# Altium PCB shinei8trfuzz.PcbDoc
Units mm, origin at the board's own origin, x right, y up, seen from the top; angles counter-clockwise.
Board outline 67.26 x 39.07 mm, 2 copper layers (Top Layer, Bottom Layer); 58 components, 31 nets, 125 pads, 6 vias.
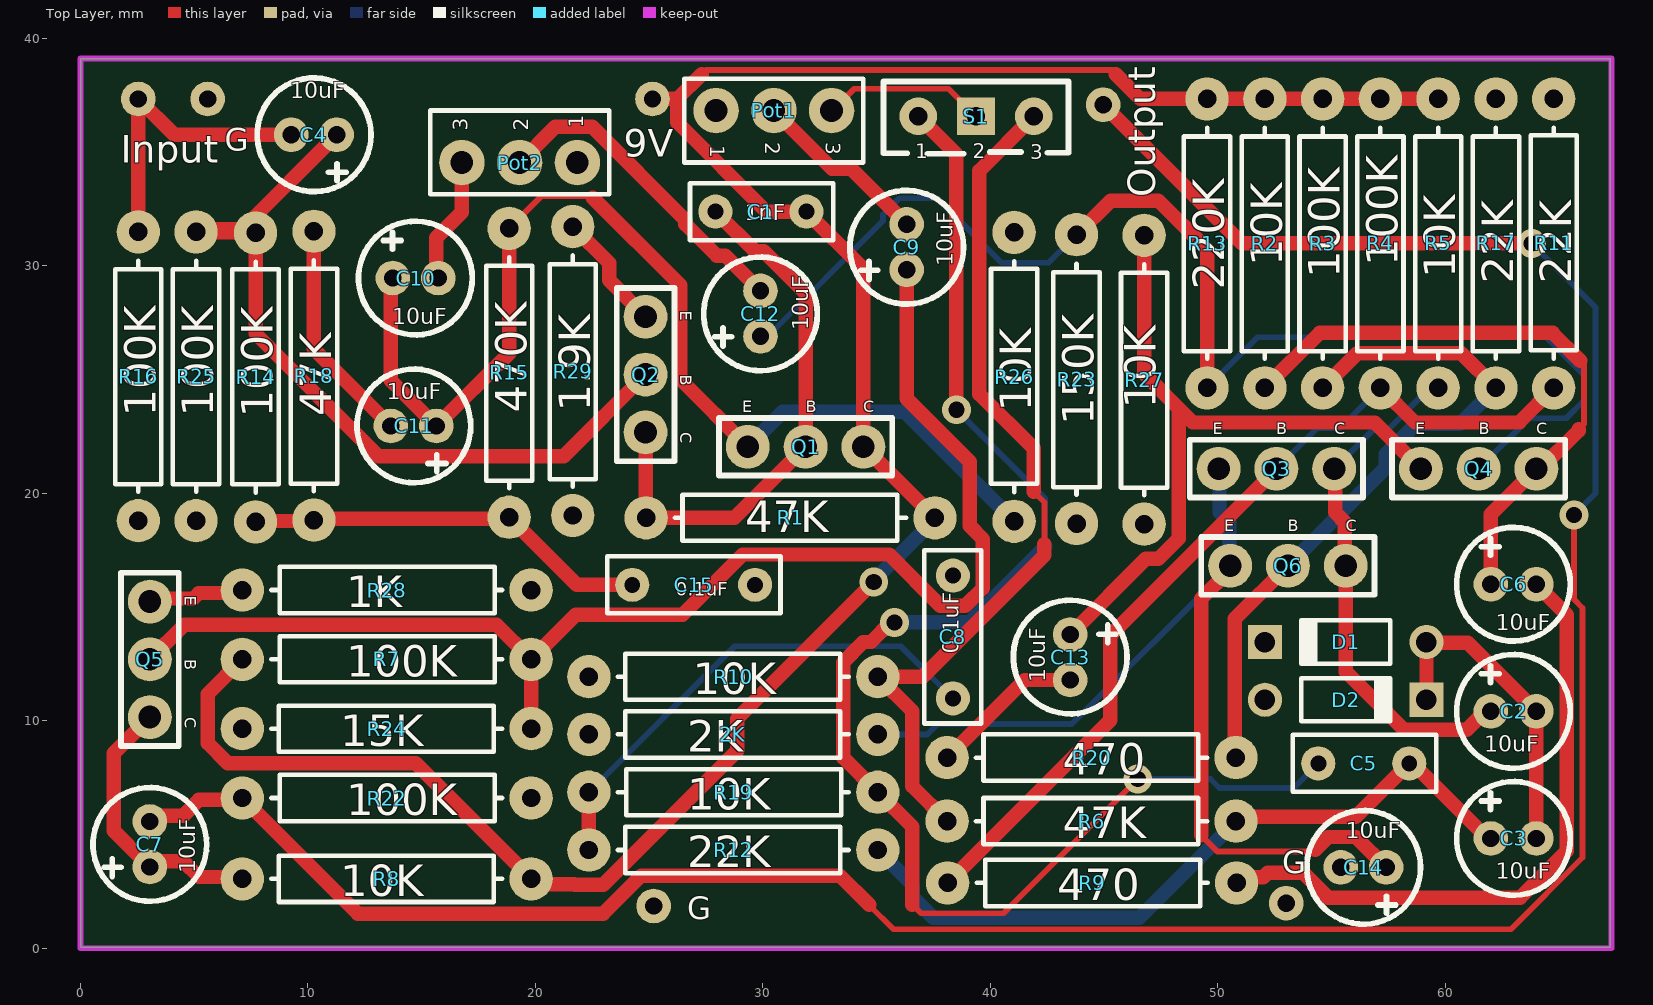
[diagram p0: Top Layer view]
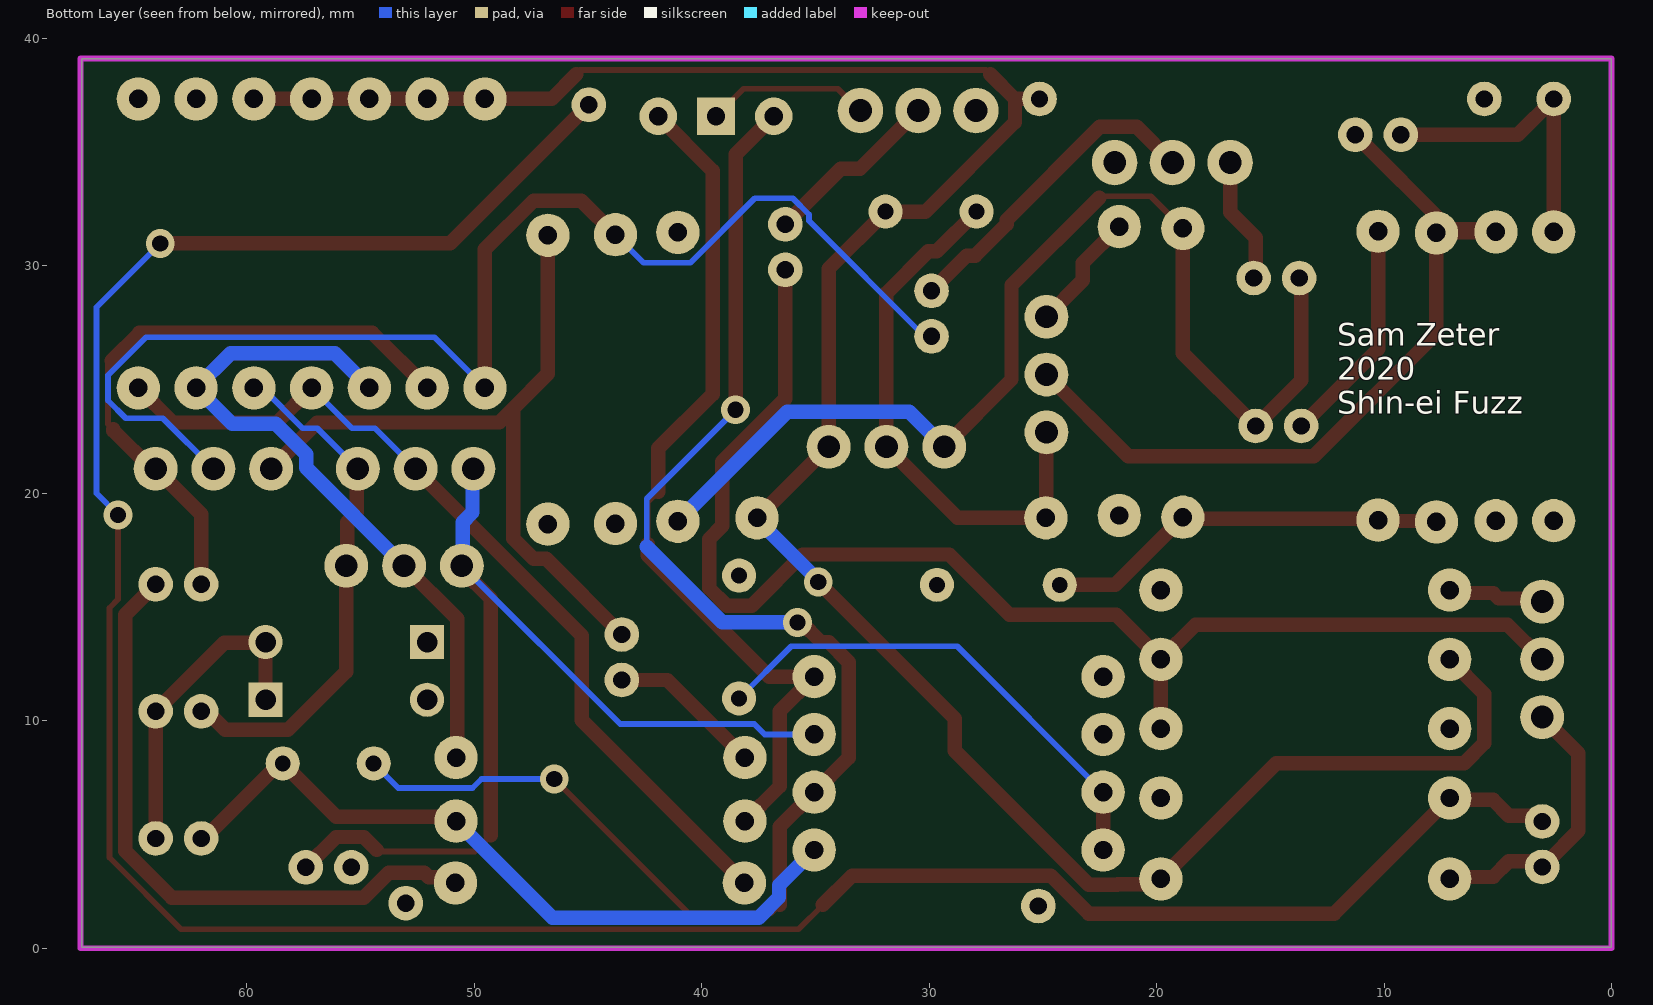
[diagram p1: Bottom Layer view, seen from below]

## Layer stack, top to bottom
Top Solder: solder mask 0.0102, Solder Resist, Dk 3.5
Top Layer: signal copper 0.0356
Dielectric 1: dielectric 0.32, FR-4, Dk 4.8
Bottom Layer: signal copper 0.0356
Bottom Solder: solder mask 0.0102, Solder Resist, Dk 3.5

## Board outline
0,0.051 67.259,0.051 67.259,39.065 67.208,39.116 0,39.116

## Design rules (kind name [scope] priority, off if disabled: settings)
BoardOutlineClearance [All] p1: gap=0.381 ignorepadtopadclearanceinfootprint=FALSE
Clearance [All] p1: gap=0.152 ignorepadtopadclearanceinfootprint=FALSE except(0: Arc-Hole Track-Hole SMDPad-Hole THPad-Hole Via-Hole Fill-Hole Poly-Hole Region-Hole Text-Hole)
ComponentClearance [All] p1: gap=0.025 collisioncheckmode=3 verticalgap=0.025 showdistances=FALSE
DiffPairsRouting [All] p1: maxlimit=10 minlimit=0.152 mostfreqgap=0.203 toplayer_minwidth=0.152 toplayer_maxwidth=0.381 toplayer_prefwidth=0.203 bottomlayer_minwidth=0.152 bottomlayer_maxwidth=0.381 bottomlayer_prefwidth=0.203 maxuncoupledlength=12.7
HoleSize [All] p1: absolutevalues=TRUE maxlimit=6.731 minlimit=0.33 maxpercent=80.000 minpercent=20.000
HoleToHoleClearance [All] p1: gap=0.254 allowstackedmicrovias=FALSE
MinimumAnnularRing [All] p1: minimumring=0.178
MinimumSolderMaskSliver [All] p1: minsoldermaskwidth=0
PlaneClearance [All] p1: clearance=0.254
PlaneConnect [All] p1: planeconnectstyle=Direct reliefexpansion=0.406 reliefentries=4 reliefconductorwidth=0.152 reliefairgap=0.152
PolygonConnect [All] p1: connectstyle=Relief reliefconductorwidth=0.203 reliefentries=4 polygonreliefangle="90 Angle" airgapwidth=0.152
RoutingCorners [All] p1: cornerstyle=45-Degree minsetback=1.25 maxsetback=1.25
RoutingVias [All] p1: holewidth=0.381 width=0.762 viastyle="Through Hole" minholewidth=0.33 minwidth=0.686 maxholewidth=2.54 maxwidth=2.896
SilkToSilkClearance [All] p1: silktosilkclearance=0
SilkToSolderMaskClearance [IsPad] p1: minsilkscreentomaskgap=0.152 clearancetoexposedcopper=TRUE
SolderMaskExpansion [All] p1: expansion=0.075
Width [All] p1: maxlimit=10.16 minlimit=0.152 preferedwidth=0.203
20 further rules are at their usual default settings.

## Components (designator, comment, footprint, x,y, rotation, side; value= is the part's Value field where it differs from the comment)
2K "2K" "RES Axial 0.5 Tayda" 22.352,9.398 r0 top value=1K
9V "General purpose pad" Pin 25.146,37.338 r270 top
C1 "1nF" "Cap Green 3.5mm" 27.915,32.385 r0 top
C2 "10uF" "Capacitor Electrolytic 2mm" 63.008,10.414 r0 top
C3 "10uF" "Capacitor Electrolytic 2mm" 63.008,4.826 r0 top
C4 "10uF" "Capacitor Electrolytic 2mm" 10.262,35.763 r180 top
C5 "1nF" "Cap Green 3.5mm" 54.42,8.128 r0 top
C6 "10uF" "Capacitor Electrolytic 2mm" 63.008,16.002 r0 top
C7 "10uF" "Capacitor Electrolytic 2mm" 3.048,4.572 r90 top
C8 "0.1uF" "Cap Green 5.4mm" 38.354,16.383 r270 top
C9 "10uF" "Capacitor Electrolytic 2mm" 36.322,30.826 r90 top
C10 "10uF" "Capacitor Electrolytic 2mm" 14.732,29.464 r0 top
C11 "10uF" "Capacitor Electrolytic 2mm" 14.646,22.962 r180 top
C12 "10uF" "Capacitor Electrolytic 2mm" 29.896,27.899 r90 top
C13 "10uF" "Capacitor Electrolytic 2mm" 43.51,12.792 r270 top
C14 "10uF" "Capacitor Electrolytic 2mm" 56.404,3.556 r180 top
C15 "0.1uF" "Cap Green 5.4mm" 29.657,15.977 r180 top
D1 "Diode 1N914" DO-35 55.626,13.462 r180 top
D2 "Diode 1N914" DO-35 55.626,10.922 r0 top
Input "General purpose pad" Pin 2.54,37.338 r90 top
Output "General purpose pad" Pin 44.958,37.084 r90 top
Pot1 "50KB" Potentiometer 30.48,36.83 r270 top
Pot2 "50KB" Potentiometer 19.304,34.544 r90 top
Q1 "Q2" "NPN Transistor Wide" 29.337,22.047 r0 top
Q2 "Q1" "NPN Transistor Wide" 24.841,27.762 r270 top
Q3 "2N3904" "NPN Transistor Wide" 50.038,21.082 r0 top
Q4 "Q4" "NPN Transistor Wide" 58.928,21.082 r0 top
Q5 "2N3904" "NPN Transistor Wide" 3.048,15.24 r270 top
Q6 "2N3904" "NPN Transistor Wide" 50.546,16.815 r0 top
R1 "47K" "RES Axial 0.5 Tayda" 24.867,18.923 r0 top value=1K
R2 "10K" "RES Axial 0.5 Tayda" 52.07,24.638 r90 top value=1K
R3 "100K" "RES Axial 0.5 Tayda" 54.61,24.638 r90 top value=1K
R4 "100K" "RES Axial 0.5 Tayda" 57.15,24.638 r90 top value=1K
R5 "10K" "RES Axial 0.5 Tayda" 59.69,24.638 r90 top value=1K
R6 "47K" "RES Axial 0.5 Tayda" 38.1,5.588 r0 top value=1K
R7 "100K" "RES Axial 0.5 Tayda" 19.812,12.7 r180 top value=1K
R8 "10K" "RES Axial 0.5 Tayda" 7.112,3.048 r0 top value=1K
R9 "470" "RES Axial 0.5 Tayda" 50.825,2.87 r180 top value=1K
R10 "10K" "RES Axial 0.5 Tayda" 22.352,11.938 r0 top value=1K
R11 "22K" "RES Axial 0.5 Tayda" 64.77,37.338 r270 top value=1K
R12 "22K" "RES Axial 0.5 Tayda" 22.352,4.318 r0 top value=1K
R13 "220K" "RES Axial 0.5 Tayda" 49.53,24.638 r90 top value=1K
R14 "100K" "RES Axial 0.5 Tayda" 7.696,31.445 r270 top value=1K
R15 "470K" "RES Axial 0.5 Tayda" 18.847,18.948 r90 top value=1K
R16 "100K" "RES Axial 0.5 Tayda" 2.54,18.796 r90 top value=1K
R17 "22K" "RES Axial 0.5 Tayda" 62.23,24.638 r90 top value=1K
R18 "47K" "RES Axial 0.5 Tayda" 10.262,18.821 r90 top value=1K
R19 "10K" "RES Axial 0.5 Tayda" 35.052,6.858 r180 top value=1K
R20 "470" "RES Axial 0.5 Tayda" 38.1,8.382 r0 top value=1K
R22 "100K" "RES Axial 0.5 Tayda" 19.812,6.604 r180 top value=1K
R23 "150K" "RES Axial 0.5 Tayda" 43.79,18.669 r90 top value=1K
R24 "15K" "RES Axial 0.5 Tayda" 7.112,9.652 r0 top value=1K
R25 "100K" "RES Axial 0.5 Tayda" 5.08,18.796 r90 top value=1K
R26 "10K" "RES Axial 0.5 Tayda" 41.046,31.471 r270 top value=1K
R27 "10K" "RES Axial 0.5 Tayda" 46.761,18.644 r90 top value=1K
R28 "1K" "RES Axial 0.5 Tayda" 19.812,15.748 r180 top
R29 "1.9K" "RES Axial 0.5 Tayda" 21.641,19.025 r90 top value=1K
S1 "SPDT Switch" "SPDT Switch" 39.37,36.576 r0 top

## Footprints (in the part's own frame and the unit in brackets; to place one, negate y for a bottom-side part, rotate by r counter-clockwise, add the part's x,y. Pads: shape width x height; smd on the part's side, far side on the other; paste and mask are expansions set on the pad)
"Cap Green 3.5mm" [mm] "3.5mm spacing"
  round 1.5 hole 0.7: 1(0,0) 2(4,0)
  silkscreen extent -1.12,-1.25 5.18,1.25, body extent -0.87,-1 5.13,1.1, height 8.1
"Cap Green 5.4mm" [mm] "5.4mm spacing for Tayda"
  round 1.5 hole 0.7: 1(0,0) 2(5.4,0)
  silkscreen extent -1.12,-1.25 6.5,1.25, body extent -0.87,-1 5.13,1.1, height 8.1
"Capacitor Electrolytic 2mm" [mil] "Based on Tayda datasheet"
  round 60 hole 30: 1(-39.37,0) 2(39.37,0)
  silkscreen extent -99,-98 98,98
DO-35 [mm] "Diode, Axial; Body 3.8 x 1.9 mm (LxDia. max), Lead Dia. 0.53 mm (max)"
  round 1.5 hole 0.9: 1(-3.55,0)
  rect 1.5x1.5 hole 0.9: 2(3.55,0)
  silkscreen extent -1.95,-0.95 2.05,0.95
"NPN Transistor Wide" [mm] "Wide Leg Spacing"
  round 1.93 hole 1: 1(5.08,0) 2(2.54,0) 3(0,0)
  silkscreen extent -1.27,-1.27 6.35,1.27, body extent 0.5,-1.63 5.26,2, height 5.32
Pin [mil] "General Purpose I/O pin"
  round 60 hole 30: 0(0,0)
Potentiometer [mm] "Normal Pinout"
  round 2 hole 1: 1(0,-2.54) 2(0,0) 3(0,2.54)
  silkscreen extent -1.4,-3.94 2.29,3.94
"RES Axial 0.5 Tayda" [mil]
  round 75 hole 32: 1(0,0) 2(500,0)
  silkscreen extent 50,-40 450,40
"SPDT Switch" [mil] "SPDT Switch"
  round 65 hole 31.5: 1(100,0) 3(-100,0)
  rect 65x65 hole 31.5: 2(0,0)
  silkscreen extent -160,-65 160,60

## Part data
2K R1 R2 R3 R4 R5 R6 R7 R8 R9 R10 R11 R12 R13 R14 R15 R16 R17 R18 R19 R20 R22 R23 R24 R25 R26 R27 R28 R29: library part "Res 0.5", "Radial 1/4 Watt Tayda", LatestRevisionDate=17-Jul-2002, LatestRevisionNote="Re-released for DXP Platform.", PackageDescription="Axial Device, Thru-Hole; 2 Leads; 0.3 in Pin Spacing", PackageReference=AXIAL-0.3, Published=8-Jun-2000, Publisher="Altium Limited"
9V Input Output: library part Pad
C1 C5: library part "Cap Green 3.5mm", "3.5mm spaced leads for green caps"
C2 C3 C4 C6 C7 C9 C10 C11 C12 C13 C14: library part "Cap Elec 2mm", "2mm Lead Spaced Electro Cap"
C8 C15: library part "Cap Green 5.4mm spaced Tayda green caps", "5.4mm spaced Tayda green caps"
D1 D2: "High Conductance Fast Diode", Code_JEDEC=DO-204-AH, ComponentLink1Description="Manufacturer Link", ComponentLink1URL=http://www.fairchildsemi.com/, ComponentLink2Description=Datasheet, ComponentLink2URL=http://www.fairchildsemi.com/ds/1N%2F1N4448.pdf, DatasheetVersion=1997, LatestRevisionDate=17-Jul-2002, LatestRevisionNote="Re-released for DXP Platform.", PackageDescription="Diode, Axial; Body 3.8 x 1.9 mm (LxDia. max), Lead Dia. 0.53 mm (max)", PackageReference=DO-35, Published=8-Jun-2000, Publisher="Altium Limited"
Pot1 Pot2: library part Potentiometer, "My Own"
Q1 Q2 Q3 Q4 Q5 Q6: library part "NPN Transistor", "NPN  Larger Leg Spacing"

## Free pads (board coordinates)
  round 1.524 hole 0.762: 4(25.197,1.854) 5(53.01,1.981) G(5.588,37.338)

## Via types
v1: diameter 1.27, hole 0.711, Top Layer to Bottom Layer, 6 vias

## Nets (pads, with @x,y where several pads share a name; then routed paths per layer and width w, separated by ;. In a path a pad name is that pad's centre, name@x,y a point inside that pad or via, vN(x,y) a via of type N, cw(c..) or ccw(c..) an arc to the next point about the centre after c; other vN are vias at no path point)
GND: 2K.1 C8.1 C14.2 C15.1 D1.2 D2.1 pad.4 pad.5 pad.G Pot1.1 Pot2.1 R10.1 R11.1 R16.1 R17.2 R22.1 R23.1 R24.1 R25.1 R26.1 R27.1 R28.1 R29.1
Net2K_2: 2K.2 C14.1 Q3.3 Q6.3 | length 44.7
  Top Layer w0.254: 49.276,4.957 49.978,4.255 54.217,4.255 54.28,4.318
  Top Layer w0.635: 49.276,4.957 49.276,15.373 50.546,16.643 Q6.3 ; 54.28,4.318 54.852,4.889 56.07,4.889 C14.1
  Bottom Layer w0.254: 2K.2 37.23,9.398 37.684,9.852 43.583,9.852 Q6.3
  Bottom Layer w0.635: Q3.3 50.076,21.044 50.076,19.165 50.508,18.732 50.508,16.853 Q6.3
Net9V_0: 9V.0 C1.2 Q1.1 R1.2 R2.2 R3.2 R4.2 R5.2 R7.2 R8.2 R13.2 | length 106
  Top Layer w0.254: 27.305,38.417 27.496,38.608 45.364,38.608
  Top Layer w0.635: R7.2 5.588,11.176 5.588,9.021 6.481,8.128 14.732,8.128 R8.2 20.055,2.805 21.71,2.805 21.721,2.794 22.983,2.794 28.868,8.679 28.868,10.097 v1(34.874,16.104) ; 9V.0 26.226,37.338 ; 27.305,38.417 26.226,37.338 ; R1.2 37.554,18.923 34.43,22.047 Q1.1 34.417,29.883 C1.2 30.163,32.385 26.226,36.322 26.226,37.338 ; 45.51,38.417 46.59,37.338 R13.2 R2.2 R3.2 R4.2 R5.2
  Bottom Layer w0.635: v1(34.874,16.104) 34.874,16.167 37.567,18.86 R1.2
NetC1_1: C1.1 Q1.2 Q2.1 R1.1 | length 24.3
  Top Layer w0.635: Q2.1 24.854,22.669 24.854,18.936 R1.1 28.753,18.923 Q1.2 31.877,28.803 30.045,30.635 29.664,30.635 C1.1
NetC2_1: C2.1 Q3.1 Q6.1 R5.1 | length 23
  Top Layer w0.635: Q3.1 55.156,21.044 55.156,19.165 55.588,18.732 55.588,16.828 55.575,16.815 55.626,16.764 55.626,12.164 58.189,9.601 60.954,9.601 61.767,10.414 C2.1
  Bottom Layer w0.254: Q3.1 56.898,22.862 57.548,22.862 59.323,24.638 R5.1
NetC2_2: C2.2 C3.2 D1.1 D2.2 | length 14.2
  Top Layer w0.635: D2.2 D1.1 59.209,13.429 60.993,13.429 C2.2 C3.2
NetC3_1: C3.1 C5.2 R6.2 R12.2 | length 32.7
  Top Layer w0.635: R6.2 50.99,5.779 56.07,5.779 C5.2 58.563,8.128 61.865,4.826 C3.1
  Bottom Layer w0.635: R12.2 36.601,2.769 36.601,2.239 37.494,1.346 46.558,1.346 R6.2
NetC4_1: C4.1 Q2.2 R14.1 R25.2 | length 35.9
  Top Layer w0.635: C4.1 7.099,31.601 5.185,31.601 R25.2 5.105,31.471 7.671,31.471 R14.1 7.696,27.026 13.094,21.628 21.247,21.628 Q2.2
NetC4_2: C4.2 Input.0 R16.2 | length 13.2
  Top Layer w0.635: R16.2 Input.0 4.115,35.763 C4.2
NetC5_1: C5.1 R19.1 S1.3 | length 65.2
  Top Layer w0.254: 36.576,1.909 36.948,1.537 40.576,1.537 v1(46.482,7.442)
  Top Layer w0.635: v1(35.789,14.326) 35.617,14.326 34.753,13.462 34.421,13.462 33.528,12.569 33.528,8.382 R19.1 36.576,5.334 36.576,1.909 ; S1.3 38.506,34.9 v1(38.506,23.673)
  Bottom Layer w0.254: v1(38.506,23.673) 42.418,19.761 42.418,17.653 ; v1(46.482,7.442) 49.683,7.442 50.077,7.048 53.341,7.048 C5.1
  Bottom Layer w0.635: v1(35.789,14.326) 39.091,14.326 42.418,17.653
NetC6_1: C6.1 Q4.1 R2.1 | length 27.1
  Top Layer w0.254: 65.862,22.809 66.103,23.05 66.103,25.667 65.938,25.832
  Top Layer w0.635: R2.1 54.483,27.051 64.719,27.051 65.938,25.832 ; C6.1 62.008,19.082 Q4.1 64.186,21.082 65.862,22.758 65.862,22.809
NetC6_2: C6.2 R9.1 | length 28
  Top Layer w0.635: R9.1@51.054,3.048 51.119,3.113 52.002,3.113 52.203,3.315 53.759,3.315 54.852,2.222 63.29,2.222 65.341,4.274 65.341,14.668 C6.2
NetC7_1: C7.1 Q5.1 R8.1 | length 12.2
  Top Layer w0.635: Q5.1 1.46,8.572 1.46,5.159 2.794,3.826 4.512,3.826 5.207,3.131 7.029,3.131 R8.1
NetC7_2: C7.2 Output.0 R22.2 | length 118.7
  Top Layer w0.254: 34.671,1.905 35.738,0.838 62.894,0.838 66.04,3.984 66.04,14.958 65.659,15.339 v1(65.659,19.05)
  Top Layer w0.635: C7.2@2.794,5.826 4.512,5.826 5.207,6.521 7.029,6.521 R22.2 12.192,1.524 22.981,1.524 24.644,3.188 33.388,3.188 34.671,1.905 ; Output.0 51.054,30.988 v1(63.805,30.988)
  Bottom Layer w0.254: v1(63.805,30.988) 66.611,28.181 66.611,20.002 v1(65.659,19.05)
NetC8_2: C8.2 R12.1 R19.2 | length 22.1
  Top Layer w0.635: R12.1 R19.2
  Bottom Layer w0.254: R19.2 28.765,13.271 36.066,13.271 C8.2
NetC9_1: C9.1 Q5.2 R7.1 R24.2 | length 59.5
  Top Layer w0.635: Q5.2 4.572,14.224 18.288,14.224 R7.1 ; R24.2 R7.1 ; C9.1 36.322,24.151 39.091,21.382 39.091,18.571 39.676,17.986 39.676,15.836 38.901,15.061 37.807,15.061 35.558,17.31 29.122,17.31 26.467,14.655 21.767,14.655 R7.1
NetC9_2: C9.2 Pot1.2 | length 7.9
  Top Layer w0.635: Pot1.2 33.04,34.27 33.879,34.27 C9.2
NetC10_1: C10.1 C11.1 Q1.3 R15.2 R26.2 | length 49.5
  Top Layer w0.254: R15.2 20.256,33.058 22.463,33.058 22.522,32.999
  Top Layer w0.635: C10.1@13.646,29.185 13.646,24.962 C11.1 18.847,26.162 R15.2 ; 22.522,32.999 26.378,29.143 26.378,25.006 Q1.3
  Bottom Layer w0.635: Q1.3 30.874,23.584 36.233,23.584 R26.2
NetC10_2: C10.2 Pot2.3 | length 5.8
  Top Layer w0.635: C10.2@15.646,29.185 15.646,31.241 16.764,32.359 Pot2.3
NetC11_2: C11.2 R18.2 | length 10
  Top Layer w0.635: R18.2 10.262,26.346 C11.2
NetC12_1: C12.1 Q4.2 R13.1 R23.2 | length 56.8
  Top Layer w0.635: R23.2 45.288,32.868 47.393,32.868 49.53,30.73 R13.1
  Bottom Layer w0.254: C12.1 30.201,26.899 35.281,31.979 35.281,32.258 35.992,32.969 37.662,32.969 40.494,30.137 42.558,30.137 R23.2 ; R13.1 51.752,26.86 64.433,26.86 66.103,25.19 66.103,24.086 65.322,23.304 63.691,23.304 Q4.2
NetC12_2: C12.2 Pot2.2 | length 14.3
  Top Layer w0.635: Pot2.2 20.876,36.116 22.495,36.116 26.593,32.017 26.593,31.838 27.978,30.453 28.341,30.453 C12.2
NetC13_1: C13.1 Q4.3 R27.2 | length 32.2
  Top Layer w0.635: C13.1 46.838,17.12 47.393,17.12 48.285,18.012 48.285,23.727 ; R27.2 46.761,25.251 48.285,23.727 ; Q4.3 56.896,23.114 48.899,23.114 48.285,23.727
NetC13_2: C13.2 R20.1 | length 6.8
  Top Layer w0.635: R20.1 41.51,11.792 C13.2
NetC15_2: C15.2 R14.2 R15.1 R18.1 | length 18.1
  Top Layer w0.635: R14.2 7.734,18.783 10.223,18.783 R18.1 10.325,18.885 19.266,18.885 19.329,18.821 19.262,18.754 19.262,18.534 21.819,15.977 C15.2
NetPot1_3: Pot1.3 S1.2 | length 7.2
  Top Layer w0.254: Pot1.3 33.068,36.83 34.021,37.782 38.163,37.782 S1.2
NetQ2_3: Q2.3 R29.2 | length 5.3
  Top Layer w0.635: R29.2 23.239,30.127 23.239,29.365 Q2.3
NetQ3_2: Q3.2 R4.1 R9.2 R11.2 | length 39.5
  Top Layer w0.635: R9.2@38.1,2.54 38.1,2.845 R9.2 45.277,10.022 45.277,13.747 52.578,21.048 Q3.2 ; R4.1 58.674,23.114 63.246,23.114 R11.2
  Bottom Layer w0.254: Q3.2 54.358,22.862 55.374,22.862 R4.1
NetQ5_3: Q5.3 R28.2 | length 4.3
  Top Layer w0.635: Q5.3 3.184,15.376 4.965,15.376 5.207,15.618 6.982,15.618 R28.2
NetQ6_2: Q6.2 R3.1 R17.1 R20.2 | length 39.9
  Top Layer w0.635: R20.2 50.754,8.428 50.754,14.483 Q6.2 ; R3.1 56.134,26.162 60.706,26.162 R17.1
  Bottom Layer w0.635: Q6.2 57.391,21.12 57.391,21.718 58.73,23.057 60.649,23.057 R17.1 60.706,26.162 56.134,26.162 R3.1
NetR6_1: R6.1 R10.2 S1.1 | length 38.6
  Top Layer w0.254: 41.91,20.062 42.38,19.592 42.38,17.767
  Top Layer w0.635: R6.1 36.576,7.112 36.576,10.414 R10.2 37.035,11.938 42.38,17.283 42.38,17.767 ; 41.91,20.062 41.91,21.975 39.522,24.363 39.522,34.188 S1.1

## Keep-outs
Keep-Out Layer:
  lines w0.254: 0,0 67.31,0 67.31,39.116 0,39.116 0,0

## Silkscreen, mask and mechanical layers (free items; w line width, h text height)
Top Overlay:
  text "G" at 6.35,35.052 h1
  text "G" at 52.832,3.302 h1
  text "G" at 26.67,1.27 h1
Bottom Overlay:
  text "Sam Zeter / 2020 / Shin-ei Fuzz" at 12.065,23.495 h1

## Text inside footprints (layer, text, board x,y; h text height)
Pot1: Top Overlay "1" at 27.686,35.306 h0.64 r270; Top Overlay "2" at 30.099,35.433 h0.64 r270; Top Overlay "3" at 32.766,35.433 h0.64 r270
Pot2: Top Overlay "1" at 22.098,36.068 h0.64 r90; Top Overlay "2" at 19.685,35.941 h0.64 r90; Top Overlay "3" at 17.018,35.941 h0.64 r90
Q1: Top Overlay "E" at 29.083,23.571 h0.51; Top Overlay "B" at 31.877,23.571 h0.51; Top Overlay "C" at 34.417,23.571 h0.51
Q2: Top Overlay "E" at 26.365,28.016 h0.51 r270; Top Overlay "B" at 26.365,25.222 h0.51 r270; Top Overlay "C" at 26.365,22.682 h0.51 r270
Q3: Top Overlay "E" at 49.784,22.606 h0.51; Top Overlay "B" at 52.578,22.606 h0.51; Top Overlay "C" at 55.118,22.606 h0.51
Q4: Top Overlay "E" at 58.674,22.606 h0.51; Top Overlay "B" at 61.468,22.606 h0.51; Top Overlay "C" at 64.008,22.606 h0.51
Q5: Top Overlay "E" at 4.572,15.494 h0.51 r270; Top Overlay "B" at 4.572,12.7 h0.51 r270; Top Overlay "C" at 4.572,10.16 h0.51 r270
Q6: Top Overlay "E" at 50.292,18.339 h0.51; Top Overlay "B" at 53.086,18.339 h0.51; Top Overlay "C" at 55.626,18.339 h0.51
S1: Top Overlay "3" at 41.758,34.696 h0.64; Top Overlay "2" at 39.218,34.722 h0.64; Top Overlay "1" at 36.703,34.722 h0.64